# Altium PCB CTR-Charging-Base-Rev-A.PcbDoc
Units mil, origin at the board's own origin, x right, y up, seen from the top; angles counter-clockwise.
Board outline 2755.91 x 2755.91 mil, 2 copper layers (Top Layer, Bottom Layer), stack 30.2 mil thick; 31 components, 15 nets, 97 pads, 12 vias.
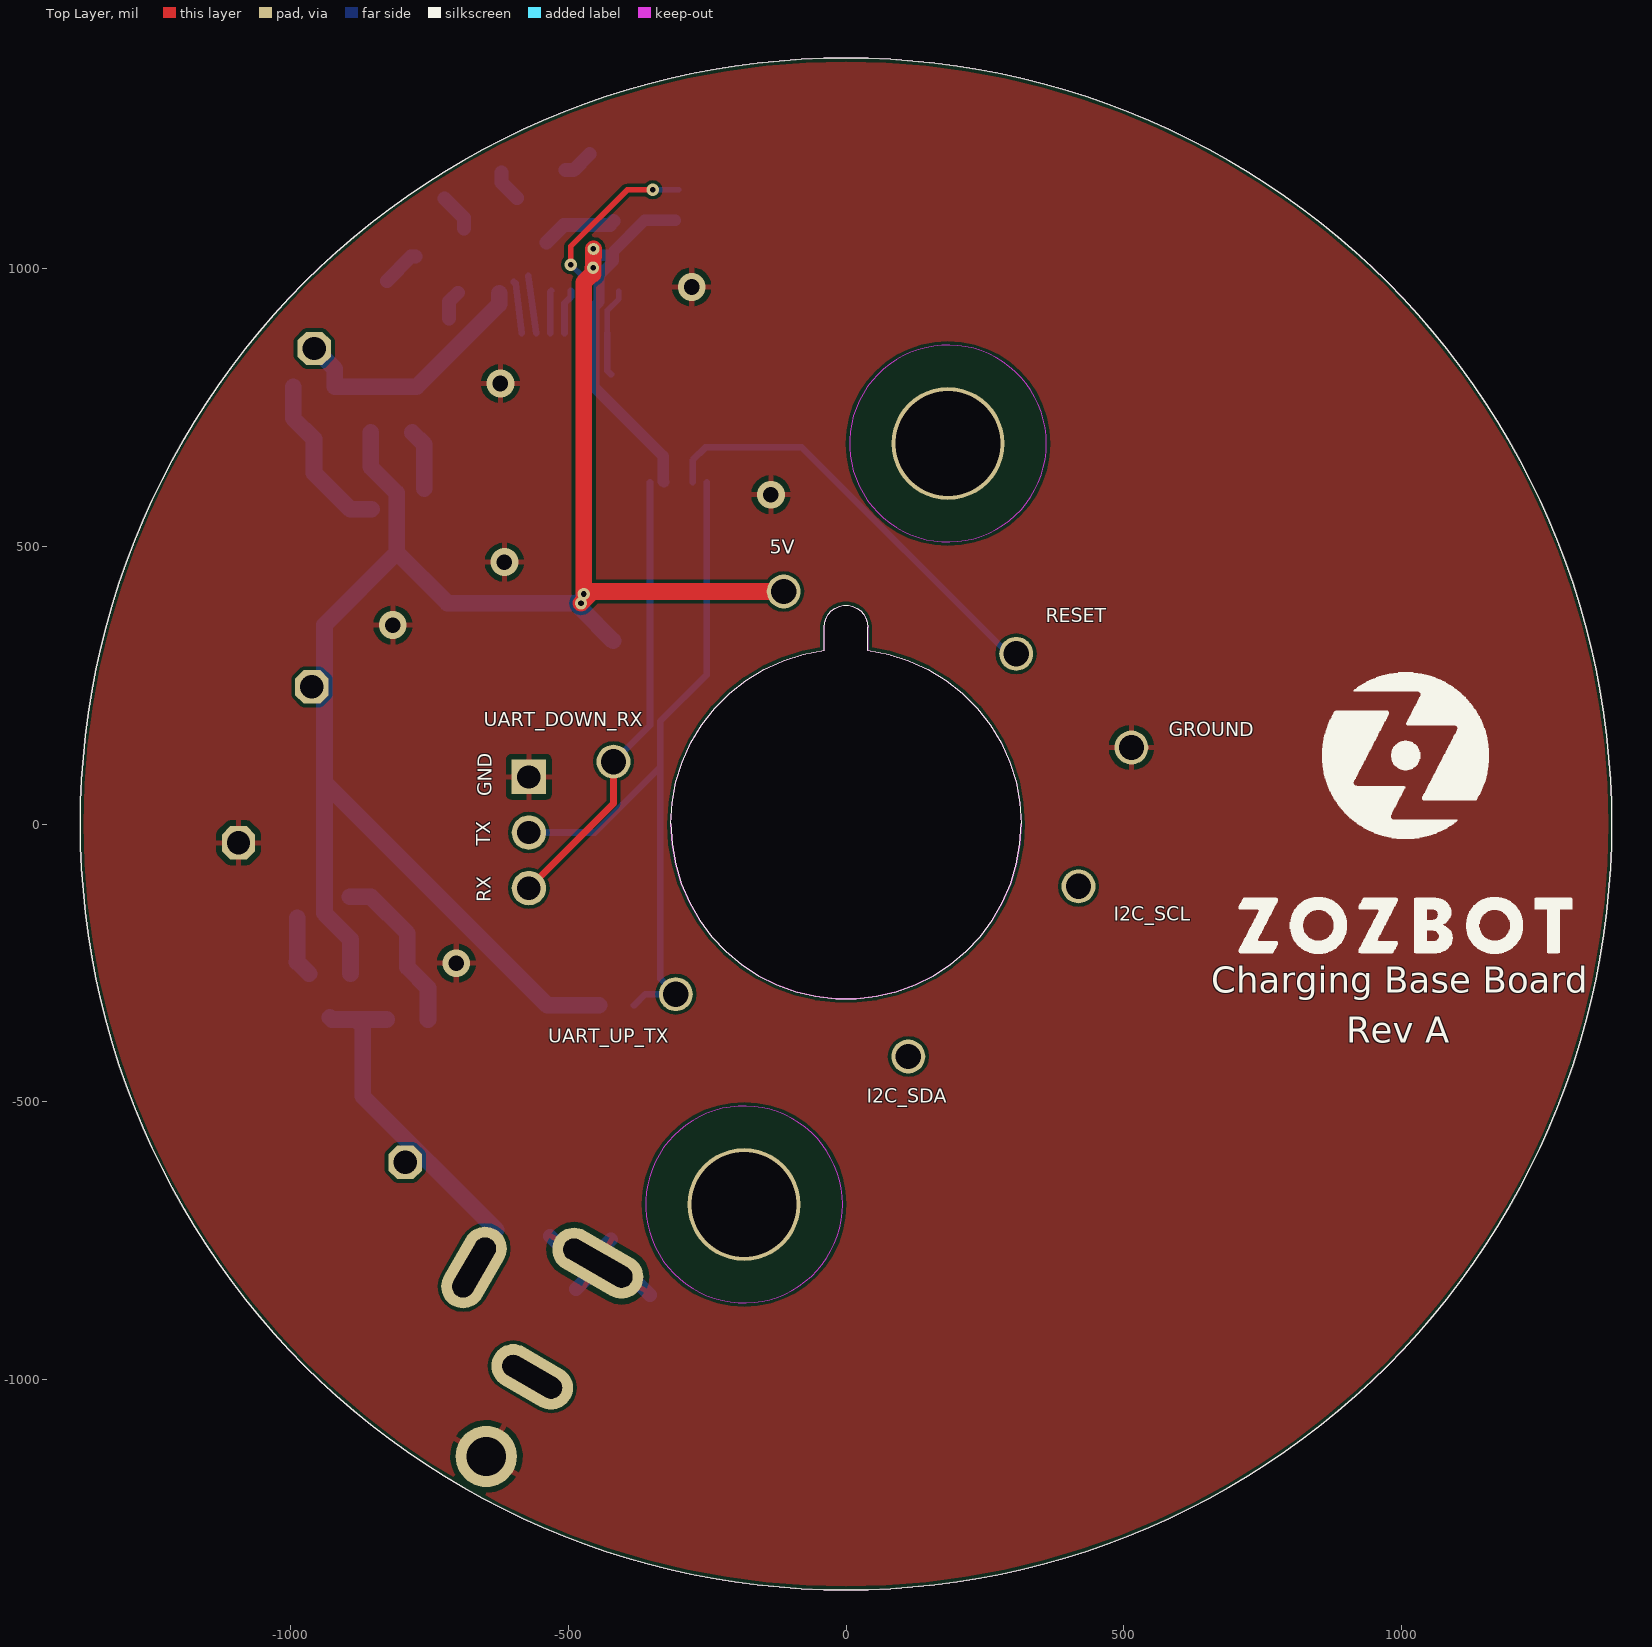
[diagram p0: Top Layer view]
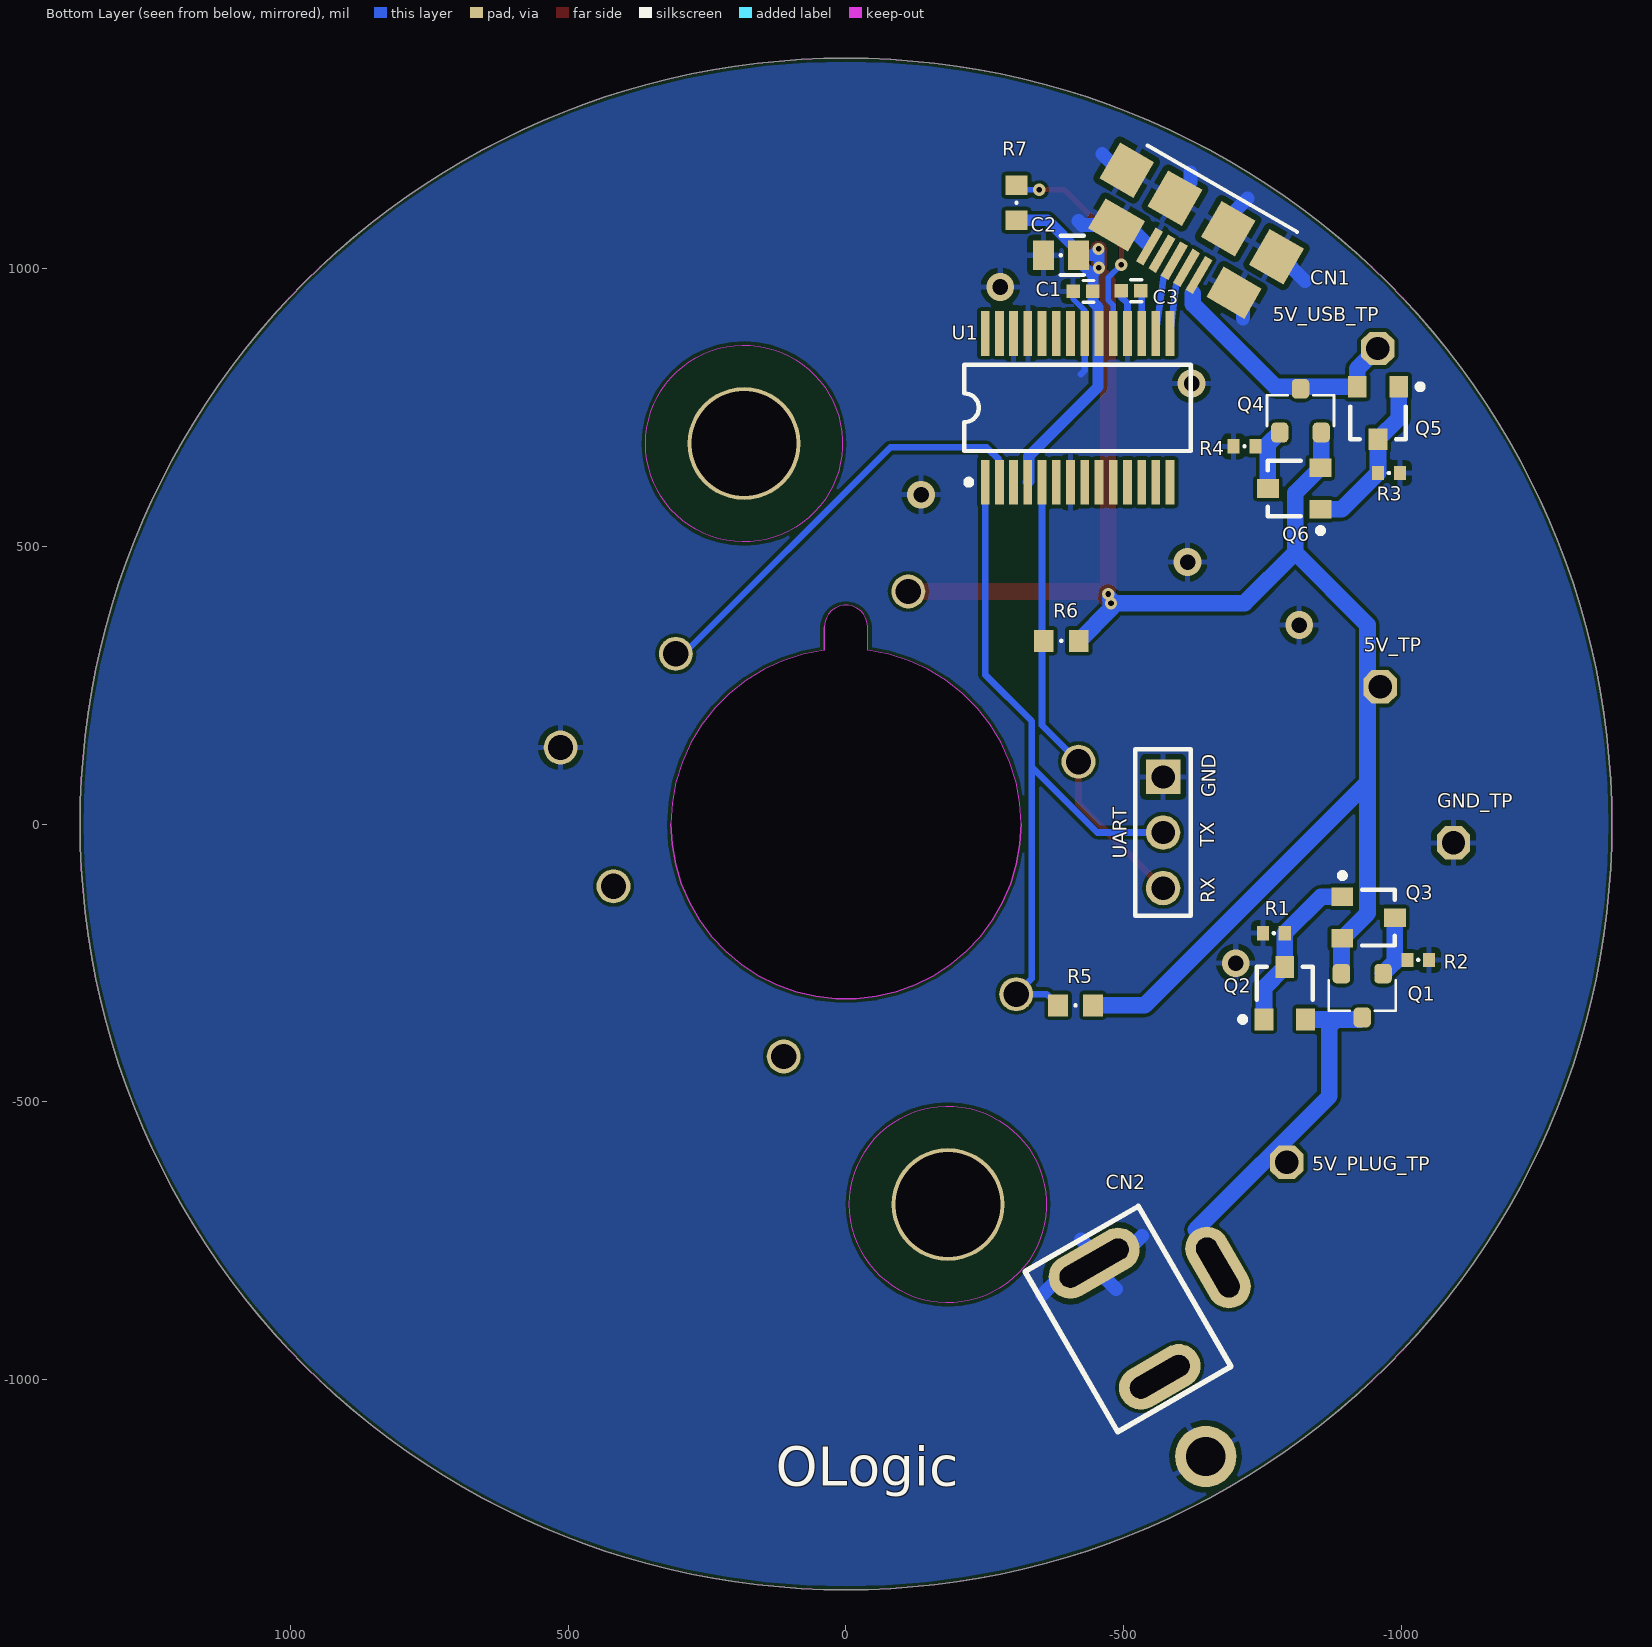
[diagram p1: Bottom Layer view, seen from below]
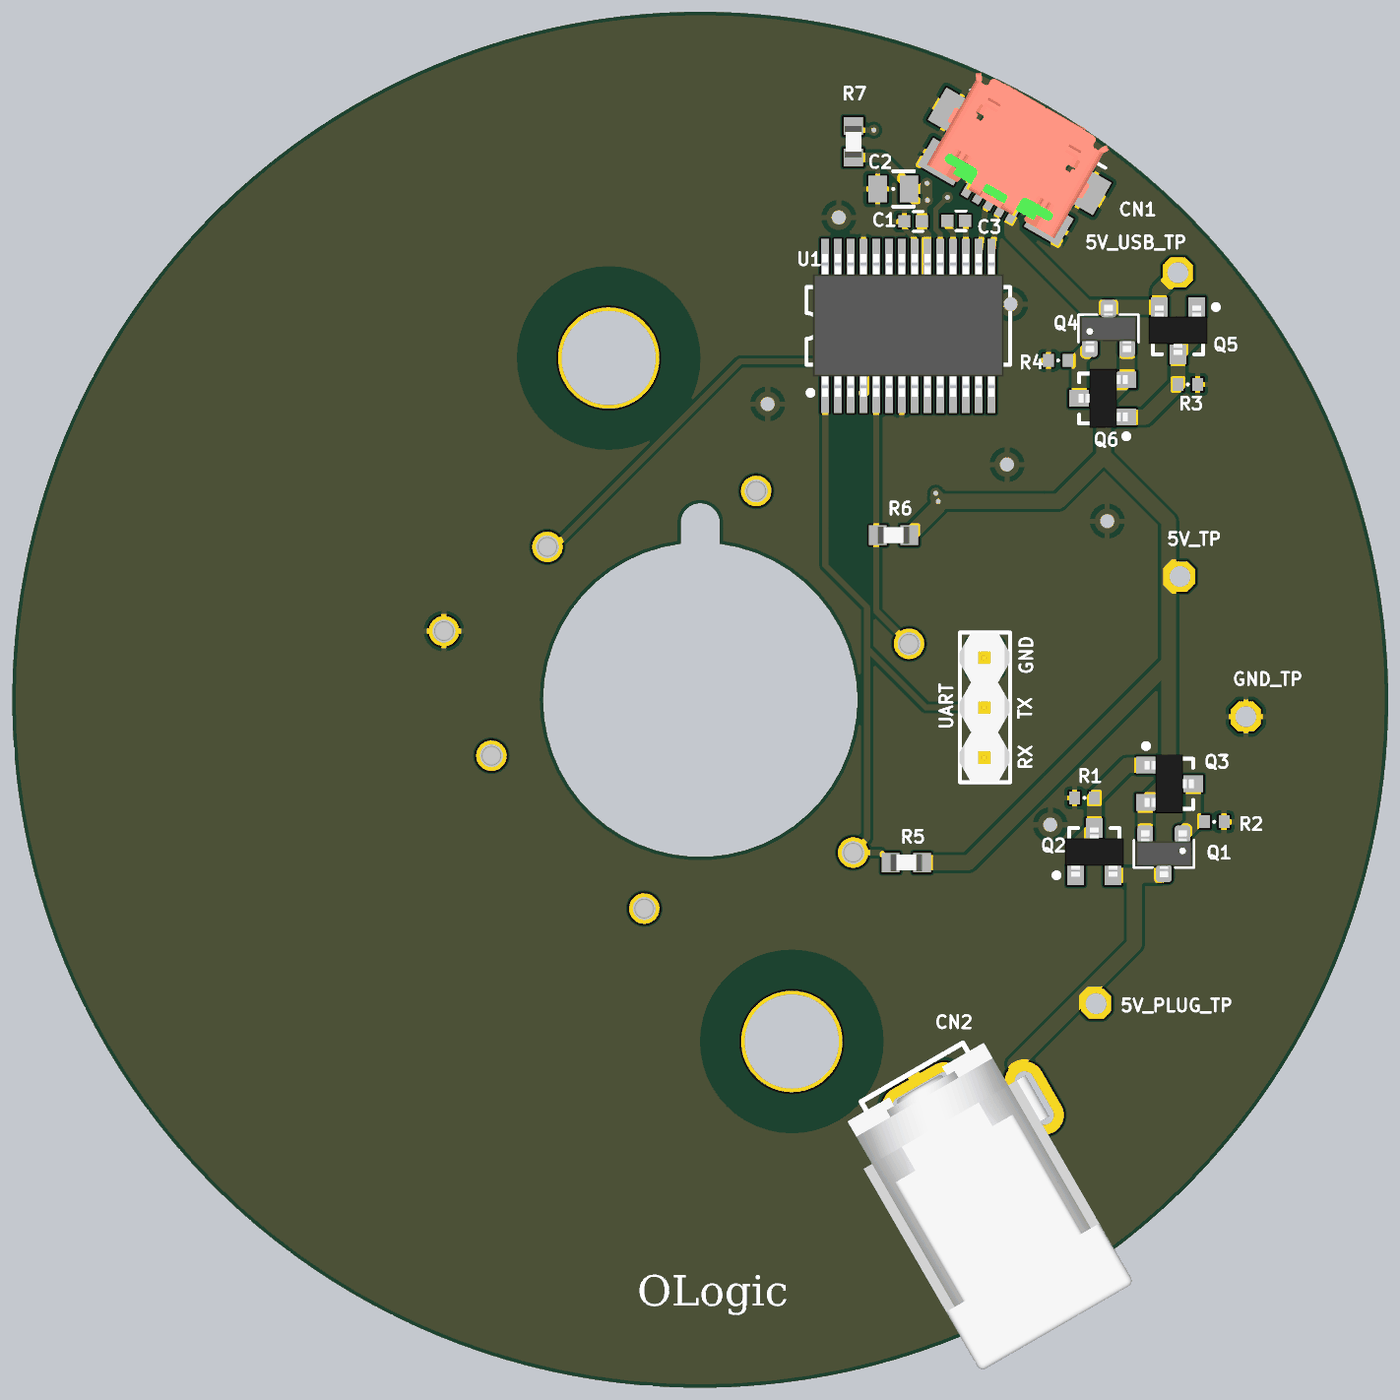
[diagram p2: 3D render of the assembled board from below, using the file's embedded part models]

## Layer stack, top to bottom
Top Solder: solder mask 0.4, Solder Resist, Dk 3.5
Top Layer: signal copper 1.4
Dielectric1: core 27.4, Dk 4.2
Bottom Layer: signal copper 1.4
Bottom Solder: solder mask 0.4, Solder Resist, Dk 3.5

## Board outline
0,-1377.95 cw(c0,0) -1377.95,0 cw(c0,0) 0,1377.95 cw(c0,0) 1377.95,0 cw(c0,0)
cut-out: 39.37,312.49 76.63,305.5 112.79,294.07 147.31,278.39 179.69,258.67 209.48,235.2 236.22,208.33 259.54,178.43 279.1,145.95 294.62,111.36 305.86,75.15 312.68,37.85 314.96,0 312.83,-36.56 306.47,-72.63 295.97,-107.72 281.46,-141.35 263.15,-173.07 241.27,-202.45 216.14,-229.09 188.08,-252.64 157.48,-272.76 124.75,-289.2 90.33,-301.73 54.69,-310.18 18.31,-314.43 -18.31,-314.43 -54.69,-310.18 -90.33,-301.73 -124.75,-289.2 -157.48,-272.76 -188.08,-252.64 -216.14,-229.09 -241.27,-202.45 -263.15,-173.07 -281.46,-141.35 -295.97,-107.72 -306.47,-72.63 -312.83,-36.56 -314.96,0 -312.68,37.85 -305.86,75.15 -294.62,111.36 -279.1,145.95 -259.54,178.43 -236.22,208.33 -209.48,235.2 -179.69,258.67 -147.31,278.39 -112.79,294.07 -76.64,305.5 -39.37,312.49 -39.37,354.33 -38.51,362.52 -35.97,370.34 -31.85,377.47 -26.34,383.59 -19.69,388.43 -12.17,391.77 -4.12,393.49 4.12,393.49 12.17,391.77 19.68,388.43 26.34,383.59 31.85,377.47 35.97,370.34 38.51,362.52 39.37,354.33

## Design rules (kind name [scope] priority, off if disabled: settings)
Clearance [All] p1: gap=6 ignorepadtopadclearanceinfootprint=FALSE except(0: Arc-Hole Track-Hole SMDPad-Hole THPad-Hole Via-Hole Fill-Hole Poly-Hole Region-Hole Text-Hole)
ComponentClearance ComponentClearance_BAT [InComponent('BT1') vs InComponent('CN3')] p1: gap=0 collisioncheckmode=3 verticalgap=0 showdistances=FALSE
ComponentClearance [All] p2: gap=7 collisioncheckmode=3 verticalgap=7 showdistances=FALSE
HoleSize [All] p1: absolutevalues=TRUE maxlimit=300 minlimit=10 maxpercent=80.000 minpercent=20.000
HoleToHoleClearance [All] p1: gap=7 allowstackedmicrovias=TRUE
MinimumSolderMaskSliver [InNet('VIN')] p1: minsoldermaskwidth=0.5
NetAntennae NetAntennae_ANT [InNetClass('ANT')] p1: netantennaetolerance=0
NetAntennae [All] p2: netantennaetolerance=0
PolygonConnect [All] p1: connectstyle=Relief reliefconductorwidth=10 reliefentries=4 polygonreliefangle="90 Angle" airgapwidth=10
RoomDefinition U_ID2 [InComponentClass('U_ID2')] p1: confinementstyle=ConfineIn formatcopy=TRUE lockcomponents=FALSE outline -1073.23,822.05 -672.83,822.05 -672.83,514.96 -1073.23,514.96
RoomDefinition U_ID1 [InComponentClass('U_ID1')] p2: confinementstyle=ConfineIn formatcopy=TRUE lockcomponents=FALSE outline -673.23,-387.01 -1073.62,-387.01 -1073.62,-79.92 -673.23,-79.92
RoutingVias [All] p1: holewidth=20 width=34 viastyle="Through Hole" minholewidth=10 minwidth=22 maxholewidth=35 maxwidth=50
SMDNeckDown [All] p1: percent=400.000
SilkToBoardRegionClearance [InNet('3.3V')] p1:
SilkToSilkClearance [All] p1: silktosilkclearance=0
SilkToSolderMaskClearance [IsPad] p1: minsilkscreentomaskgap=0 clearancetoexposedcopper=TRUE
SolderMaskExpansion [All] p1: expansion=4
ViasUnderSMD [All] p1: allowed=FALSE
Width [All] p1: maxlimit=30 minlimit=7 preferedwidth=7 minimp=50.000000 maximp=50.000000 favimp=50.000000
22 further rules are at their usual default settings.

## Classes and differential pairs
component class U_ID2: Q4 Q5 Q6 R3 R4
component class U_ID1: Q1 Q2 Q3 R1 R2
component class CTR-Charging-Base-Rev-A-Power-1: 5V 5V_PLUG_TP 5V_TP 5V_USB_TP C1 C2 C3 CN1 CN2 GND_TP GROUND I2C_SCL I2C_SDA R5 R6 R7 RESET U1 UART UART_DOWN_RX UART_UP_TX

## Components (designator, comment, footprint, x,y, rotation, side; value= is the part's Value field where it differs from the comment)
5V "Pogo Pin Target Small" CTR_POGO_PIN_TARGET_SMALL -112.09,418.31 r90 top locked
5V_PLUG_TP "Test Point" "TestPoint-TH 42 mil" -792.91,-608.66 r90 bottom
5V_TP "Test Point" "TestPoint-TH 42 mil" -961.02,246.85 r90 bottom
5V_USB_TP "Test Point" "TestPoint-TH 42 mil" -956.69,855.51 r90 bottom
C1 "0.1uF" CAPC0402(1005)_N -426.38,958.27 r0 bottom
C2 "10uF" CAPC0805(2012)_L -386.61,1023.23 r0 bottom
C3 "0.1uF" CAPC0402(1005)_N -512.6,959.45 r0 bottom
CN1 "Micro-USB RA Type B" USB-MICRO-B -639.76,1098.62 r300 bottom
CN2 "PJ-050AH 2.0mm" PJ-050AH -446.46,-790.1 r330 bottom
GND_TP "Test Point" "TestPoint-TH 42 mil" -1092.91,-33.86 r90 bottom
GROUND "Pogo Pin Target Small" CTR_POGO_PIN_TARGET_SMALL 513.39,137.56 r90 top locked
I2C_SCL "Pogo Pin Target Small" CTR_POGO_PIN_TARGET_SMALL 418.31,-112.09 r0 top locked
I2C_SDA "Pogo Pin Target Small" CTR_POGO_PIN_TARGET_SMALL 112.09,-418.31 r0 top locked
Q1 "DMG2305UX" DMG2305UX-7 -928.74,-308.66 r0 bottom
Q2 "MMBT2907A" SOT23 -789.37,-304.33 r180 bottom
Q3 "MMBT2907A" SOT23 -940.16,-168.5 r270 bottom
Q4 "DMG2305UX" DMG2305UX-7 -817.72,743.7 r180 bottom
Q5 "MMBT2907A" SOT23 -957.09,739.37 r0 bottom
Q6 "MMBT2907A" SOT23 -806.3,603.54 r90 bottom
R1 "47K" RESC0402(1005)_N -769.68,-196.46 r180 bottom
R2 "54.9K" RESC0402(1005)_N -1029.53,-244.49 r0 bottom
R3 "47K" RESC0402(1005)_N -976.77,631.5 r0 bottom
R4 "54.9K" RESC0402(1005)_N -716.93,679.53 r180 bottom
R5 "10K" RESC0603(1608)_N -412.99,-326.38 r180 bottom
R6 "10K" RESC0603(1608)_N -387.4,329.53 r0 bottom
R7 "10K" RESC0603(1608)_N -306.69,1117.72 r270 bottom
RESET "Pogo Pin Target Small" CTR_POGO_PIN_TARGET_SMALL 306.22,306.22 r90 top locked
U1 "FT232RL" SSOP-28 -416.73,748.82 r180 bottom
UART "Header 3" HDR1X3 -570.47,84.65 r270 bottom
UART_DOWN_RX "Pogo Pin Target Small" CTR_POGO_PIN_TARGET_SMALL -418.31,112.09 r90 top locked
UART_UP_TX "Pogo Pin Target Small" CTR_POGO_PIN_TARGET_SMALL -306.22,-306.22 r90 top locked

## Footprints (in the part's own frame and the unit in brackets; to place one, negate y for a bottom-side part, rotate by r counter-clockwise, add the part's x,y. Pads: shape width x height; smd on the part's side, far side on the other; paste and mask are expansions set on the pad)
CAPC0402(1005)_N [mm] "Chip Capacitor, Body 1.0x0.5mm, Height 0.7mm, IPC Medium Density"
  rect 0.62x0.62 smd: 1(-0.45,0) 2(0.45,0)
  silkscreen extent -0.5,-0.5 0,0.5, body extent -0.55,-0.3 0.55,0.3, height 0.7
CAPC0805(2012)_L [mm] "Chip Capacitor, Body 2.0x1.2mm, Height 1.55mm, IPC High Density"
  rect 0.95x1.35 smd: 1(-0.8,0) 2(0.8,0)
  silkscreen extent -1.05,-0.9 0.05,0.9, body extent -1.1,-0.72 1.1,0.72, height 1.55
CTR_POGO_PIN_TARGET_SMALL [mm] "Through-hole pogo pin target, small"
  round 1.55 hole 1.15: 1(0,0)
  body extent -1.1,-1.1 1.11,1.11, height 3.44
DMG2305UX-7 [mm] "SOT95P240X110-3L30 - Small Outline Transistor (SOT23), 0.95 mm pitch; 3 pin, 2.90 mm L X 1.30 mm W X 1.10 mm H body"
  rrect50% 0.8x0.9 smd: D(0,1) G(-0.95,-1) S(0.95,-1)
  silkscreen extent -1.53,-0.7 1.53,0.7, body extent -1.45,-1.2 1.45,1.2, height 1.1
HDR1X3 [mil]
  rect 62x62 hole 42: 1(0,0)
  round 62 hole 42: 2(100,0) 3(200,0)
  silkscreen extent -50,-50 250,50, body extent -50,-51 250,49, height 330
PJ-050AH [mm] "Power Connector, 2.0mm ID, 5.5mm OD"
  oval 4.5x2 hole 1 slot 3.5 at 0 deg: 1(0,0)
  oval 4x2 hole 1 slot 3 at 0 deg: 2(0,6)
  oval 2x4 hole 1 slot 3 at 90 deg: 3(-4.8,3)
  round 2.8 hole 1.8: 4(0,10.2)
  silkscreen extent -3.05,-1.24 2.92,7.21, body extent -4.98,-0.72 4.52,13.68, height 11
RESC0402(1005)_N [mm] "Chip Resistor, Body 1.0x0.5mm, IPC Medium Density"
  rect 0.55x0.65 smd: 1(-0.5,0) 2(0.5,0)
  silkscreen extent -0.05,-0.05 0.05,0.05, body extent -0.52,-0.27 0.53,0.28, height 0.4
RESC0603(1608)_N [mm] "Chip Resistor, Body 1.6x0.8mm, IPC Medium Density"
  rect 0.9x1 smd: 1(-0.8,0) 2(0.8,0)
  silkscreen extent -0.05,-0.05 0.05,0.05, body extent -0.8,-0.43 0.8,0.43, height 0.51
SOT23 [mm] "SOT-23; 3 Leads; Body 3.0 x 2.5 mm, inc. leads (LxW max)"
  rect 0.85x1 smd: 1(-0.95,-1.2) 2(0.95,-1.2) 3(0,1.2)
  silkscreen extent -2.05,-1.32 1.28,1.2, body extent -1.5,-1.27 1.5,1.23, height 1.1
SSOP-28 [mm] "SSOP, Plastic; 28 Leads; Body Width 5.2 mm; Pitch 0.65 mm"
  rect 0.4x2.05 smd: 1(-4.225,-3.4) 2(-3.575,-3.4) 3(-2.925,-3.4) 4(-2.275,-3.4) 5(-1.625,-3.4) 6(-0.975,-3.4) 7(-0.325,-3.4) 8(0.325,-3.4) 9(0.975,-3.4) 10(1.625,-3.4) 11(2.275,-3.4) 12(2.925,-3.4) 13(3.575,-3.4) 14(4.225,-3.4) 15(4.225,3.4) 16(3.575,3.4) 17(2.925,3.4) 18(2.275,3.4) 19(1.625,3.4) 20(0.975,3.4) 21(0.325,3.4) 22(-0.325,3.4) 23(-0.975,3.4) 24(-1.625,3.4) 25(-2.275,3.4) 26(-2.925,3.4) 27(-3.575,3.4) 28(-4.225,3.4)
  silkscreen extent -5.18,-3.52 5.17,1.98, body extent -4.85,-3.6 4.85,3.66, height 1.2
"TestPoint-TH 42 mil" [mil] "Test Point - Thru-Hole 42 mil"
  oct 60x60 hole 42: 1(0,0)
USB-MICRO-B [mm] "Micro RA USB-B Connector"
  rect 1.9x1.8 smd: 0(0,-3.95) 0(0,1.4) 0(0,-1.4) 0(0,3.95)
  rect 1.6x2 smd: 0(2.4,3.1)
  rect 1.6x2.1 smd: 0(2.4,-3.1)
  rect 1.8x0.4 smd: 1(2.5,1.3) 2(2.5,0.65) 3(2.5,0) 4(2.5,-0.65) 5(2.5,-1.3)
  silkscreen extent -1.45,-3.7 -1.45,4.2, body extent -2.66,-3.96 3,3.96, height 2.73

## Part data
5V GROUND I2C_SCL I2C_SDA RESET UART_DOWN_RX UART_UP_TX: library part "CTR Pogo Pin Target Small", "CTR Pogo Pin Target Small", Manufacturer 1=CTR, Manufacturer Part Number 1="Small Target", Category="Connectors, Interconnects", Material="Copper Alloy", Mounting Type="Through Hole", Part Status=Active, Plating=Gold, Supplier 1=CTR, Supplier Part Number 1="Small Target", Supplier Stock 1=9999999, Supplier Unit Price 1=0.131
5V_PLUG_TP 5V_TP 5V_USB_TP GND_TP: library part "TestPoint, small"
C1 C3: library part "CAP CER 0.1UF 16V 10% X5R 0402", "0.1uF 0402 16V", Capacitance=0.1µF, Manufacturer="Taiyo Yuden", Manufacturer Part Number=EMK105BJ104KV-F, Operating Temperature="-55°C ~ 85°C", Package / Case=0402, Ratings=-, Supplier Part Number 1=587-1226-2-ND, Temperature Coefficient=X5R, Tolerance=±10%, Voltage - Rated=16V, Applications="General Purpose", Category=Capacitors, ComponentLink1Description=http://www.yuden.co.jp/or/product/category/capacitor/EMK105BJ104KV-F.pdf, ComponentLink1URL=http://www.yuden.co.jp/or/product/category/capacitor/EMK105BJ104KV-F.pdf, Features=-, Height - Seated (Max)=-, Lead Spacing=-, Lead Style=-, Mounting Type="Surface Mount, MLCC", Packaging="Tape & Reel (TR)", Pricing 1="10000=0.0042, 20000=0.004, 30000=0.0038, 50000=0.0034 (USD)", RoHS="RoHS Compliant", Size / Dimension="0.039\" L x 0.020\" W (1.00mm x 0.50mm)", Stock 1=590000, Supplier 1=Digi-Key, Thickness (Max)="0.022\" (0.55mm)"
C2: library part "CAP CER 10UF 16V 10% X5R 0805", "10UF 0805 16V", Capacitance=10µF, Manufacturer="Murata Electronics North America", Manufacturer Part Number=GRM21BR61C106KE15L, Operating Temperature="-55°C ~ 85°C", Package / Case=0805, Ratings=-, Supplier Part Number 1=490-3886-1-ND, Temperature Coefficient=X5R, Tolerance=±10%, Voltage - Rated=16V, Applications="General Purpose", Category=Capacitors, ComponentLink1Description=http://www.murata.com/products/catalog/pdf/c02e.pdf, ComponentLink1URL=http://www.murata.com/products/catalog/pdf/c02e.pdf, Features=-, Height - Seated (Max)=-, Lead Spacing=-, Lead Style=-, Mounting Type="Surface Mount, MLCC", Packaging="Cut Tape (CT)", Pricing 1="1=0.25, 10=0.171, 50=0.1038, 100=0.0872, 250=0.07056, 500=0.06226, 1000=0.05291 (USD)", RoHS="RoHS Compliant", Size / Dimension="0.079\" L x 0.049\" W (2.00mm x 1.25mm)", Stock 1=1725870, Supplier 1=Digi-Key, Thickness (Max)="0.053\" (1.35mm)"
CN1: library part Micro-USB-B, Manufacturer 1=FCI, Manufacturer Part Number 1=10118192-0001LF, Supplier Part Number 1=609-4613-1-ND, Supplier 1=Digi-Key
CN2: library part PJ-050AH, "Power Barrel Connector Jack 2.00mm ID 5.50mm OD Through Hole, Right Angle", Color=Black, Current Rating=5A, Manufacturer=CUI, Operating Temperature="-25°C ~ 85°C", Supplier Part Number 1=CP-050AH-ND, Voltage - Rated=24VDC, Category="Connectors, Interconnects", ComponentLink1Description=http://www.mouser.com/ds/2/670/PJ-050AH-524150.pdf, ComponentLink1URL=http://www.mouser.com/ds/2/670/PJ-050AH-524150.pdf, Connector Type=Jack, Contact Material=Copper, Contact Material - Plating=Nickel, Family="Barrel - Power Connectors", Features=-, Gender=Male, Housing Color=Black, Housing Material=Thermoplastic, Internal Switch(s)="Single Switch, Normally Closed", Manufacturer Part Number=PJ-050AH, Mounting Type="Through Hole, Right Angle", Number of Positions/Contacts="2 Conductors, 3 Contacts", Plug/Mating Plug Diameter="2.1mm ID, 5.5mm OD", Pricing 1="1=0.78, 10=0.689, 25=0.648, 50=0.621, 100=0.594, 250=0.54, 500=0.486, 1000=0.432, 2500=0.3915 (USD)", Series=-, Shielding=Unshielded, Stock 1=4408, Supplier 1=Digikey, Termination=Solder
Q1 Q4: "MOSFET P-CH 20V 4.2A SOT23", Current - Continuous Drain (Id) @ 25°C="4.2A (Ta)", Drain to Source Voltage (Vdss)=20V, Input Capacitance (Ciss) @ Vds="808pF @ 15V", Manufacturer="Diodes Incorporated", Manufacturer Part Number=DMG2305UX-7, Operating Temperature="-55°C ~ 150°C (TJ)", Package / Case="TO-236-3, SC-59, SOT-23-3", Power - Max=1.4W, Supplier Device Package=SOT-23, Supplier Part Number 1=DMG2305UX-7DICT-ND, Category="Discrete Semiconductor Products", ComponentLink1Description=http://www.diodes.com/_files/datasheets/DMG2305UX.pdf, ComponentLink1URL=http://www.diodes.com/_files/datasheets/DMG2305UX.pdf, Creator=osman, FET Feature=Standard, FET Type="MOSFET P-Channel, Metal Oxide", Gate Charge (Qg) @ Vgs="10.2nC @ 4.5V", Mounting Type="Surface Mount", Packaging="Cut Tape (CT)", Pricing 1="1=0.38, 10=0.311, 100=0.1649, 500=0.10846, 1000=0.0739 (USD)", Rds On (Max) @ Id, Vgs="52 mOhm @ 4.2A, 4.5V", RoHS="RoHS Compliant", Stock 1=78669, Supplier 1=Digi-Key, Vgs(th) (Max) @ Id="900mV @ 250µA"
Q2 Q3 Q5 Q6: "PNP General Purpose Amplifier", Current - Collector (Ic) (Max)=800mA, Current - Collector Cutoff (Max)=-, DC Current Gain (hFE) (Min) @ Ic, Vce="100 @ 150mA, 10V", Frequency - Transition=200MHz, Manufacturer="Fairchild Semiconductor", Package / Case="TO-236-3, SC-59, SOT-23-3", Power - Max=350mW, Supplier Device Package=SOT-23, Supplier Part Number 1=MMBT2907AFSCT-ND, Voltage - Collector Emitter Breakdown (Max)=60V, Category="Discrete Semiconductor Products", ComponentLink1Description=http://www.fairchildsemi.com/ds/MM/MMBT2907A.pdf, ComponentLink1URL=http://www.fairchildsemi.com/ds/MM/MMBT2907A.pdf, Manufacturer Part Number=MMBT2907A, Mounting Type="Surface Mount", MPN=MMBT2907A, Packaging="Cut Tape (CT)", PN=MMBT2907AFSCT-ND, Pricing 1="1=0.2, 10=0.187, 25=0.17, 100=0.1224, 250=0.07208, 500=0.0598, 1000=0.04079 (USD)", RoHS="RoHS Compliant", Stock 1=74892, Supplier 1=Digi-Key, Transistor Type=PNP, Vce Saturation (Max) @ Ib, Ic="1.6V @ 50mA, 500mA", Vendor=Digikey
R1 R3: library part "RES 47K OHM 5% 1/10W 0402", "47K 0402", Manufacturer="Panasonic Electronic Components", Manufacturer Part Number=ERJ-2GEJ473X, Operating Temperature="-55°C ~ 155°C", Package / Case="0402 (1005 Metric)", Power (Watts)="0.1W, 1/10W", Resistance (Ohms)=47k, Supplier Device Package=0402, Supplier Part Number 1=P47KJCT-ND, Temperature Coefficient=±200ppm/°C, Tolerance=±5%, Category=Resistors, ComponentLink1Description=http://industrial.panasonic.com/www-cgi/jvcr13pz.cgi?E+PZ+3+AOA0001+ERJ2GEJ473X+7+WW, ComponentLink1URL=http://industrial.panasonic.com/www-cgi/jvcr13pz.cgi?E+PZ+3+AOA0001+ERJ2GEJ473X+7+WW, Composition="Thick Film", Features="Automotive AEC-Q200", Height="0.016\" (0.40mm)", Number of Terminations=2, Packaging="Cut Tape (CT)", Pricing 1="1=0.1, 50=0.0106, 100=0.0078, 250=0.00596, 500=0.00476, 1000=0.0035, 5000=0.00251 (USD)", RoHS="RoHS Compliant", Size / Dimension="0.039\" L x 0.020\" W (1.00mm x 0.50mm)", Stock 1=1670564, Supplier 1=Digi-Key
R2 R4: library part "RES 54.9K OHM 1% 1/10W 0402", "54.9K 1% 0402", Manufacturer="Panasonic Electronic Components", Manufacturer Part Number=ERJ-2RKF5492X, Operating Temperature="-55°C ~ 155°C", Package / Case="0402 (1005 Metric)", Power (Watts)="0.1W, 1/10W", Resistance (Ohms)=54.9k, Supplier Device Package=0402, Supplier Part Number 1=P54.9KLCT-ND, Temperature Coefficient=±100ppm/°C, Tolerance=±1%, Category=Resistors, ComponentLink1Description=http://industrial.panasonic.com/www-cgi/jvcr13pz.cgi?E+PZ+3+AOA0002+ERJ2RKF5492X+7+WW, ComponentLink1URL=http://industrial.panasonic.com/www-cgi/jvcr13pz.cgi?E+PZ+3+AOA0002+ERJ2RKF5492X+7+WW, Composition="Thick Film", Failure Rate=-, Features="Automotive AEC-Q200", Height - Seated (Max)="0.016\" (0.40mm)", Number of Terminations=2, Packaging="Cut Tape (CT)", Part Status=Active, Pricing 1="1=0.1, 50=0.015, 100=0.011, 250=0.0084, 500=0.00674, 1000=0.00496, 5000=0.00355 (USD)", RoHS="RoHS Compliant", Size / Dimension="0.039\" L x 0.020\" W (1.00mm x 0.50mm)", Stock 1=151111, Supplier 1=Digi-Key
R5 R6 R7: library part "RES 10K OHM 1/10W 5% 0603 SMD", "10K 0603", Manufacturer="Panasonic Electronic Components", Manufacturer Part Number=ERJ-3GEYJ103V, Package / Case="0603 (1608 Metric)", Power (Watts)="0.1W, 1/10W", Resistance (Ohms)=10k, Supplier Device Package=0603, Supplier Part Number 1=P10KGCT-ND, Temperature Coefficient=±200ppm/°C, Tolerance=±5%, Category=Resistors, ComponentLink1Description=http://industrial.panasonic.com/www-cgi/jvcr13pz.cgi?E+PZ+3+AOA0001+ERJ3GEYJ103V+7+WW, ComponentLink1URL=http://industrial.panasonic.com/www-cgi/jvcr13pz.cgi?E+PZ+3+AOA0001+ERJ3GEYJ103V+7+WW, Composition="Thick Film", Features=-, Height="0.022\" (0.55mm)", Number of Terminations=2, Packaging="Cut Tape (CT)", Pricing 1="1=0.1, 50=0.0126, 100=0.0096, 250=0.00716, 500=0.00528, 1000=0.00352, 2500=0.00297 (USD)", RoHS="RoHS Compliant", Size / Dimension="0.063\" L x 0.031\" W (1.60mm x 0.80mm)", Stock 1=4724855, Supplier 1=Digi-Key
U1: "USB Bridge, USB to UART USB 2.0 UART Interface 28-SSOP", Manufacturer="Future Technology Devices International (FTDI)", Manufacturer Part Number=FT232RL-REEL, Operating Supply Voltage (Max)=5.25V, Operating Supply Voltage (Min)=3.3V, Operating Supply Voltage (Typ)=5V, Operating Temperature (Max)=85C, Operating Temperature (Min)=-40C, Operating Temperature Classification=Industrial, Package Type=SSOP, Supplier Part Number 1=768-1007-1-ND, Supply Current=15(Typ)mA, ComponentLink1Description=https://datasheet.ciiva.com/34304/2161019-34304054.pdf, ComponentLink1URL=https://datasheet.ciiva.com/34304/2161019-34304054.pdf, ComponentLink2Description=https://datasheet.ciiva.com/1787/ds-ft232r-1787047.pdf, ComponentLink2URL=https://datasheet.ciiva.com/1787/ds-ft232r-1787047.pdf, ComponentLink3Description=https://datasheet.ciiva.com/1787/ds-ft232r-1787048.pdf, ComponentLink3URL=https://datasheet.ciiva.com/1787/ds-ft232r-1787048.pdf, ComponentLink4Description=https://datasheet.ciiva.com/1787/ds-ft232r-1787049.pdf, ComponentLink4URL=https://datasheet.ciiva.com/1787/ds-ft232r-1787049.pdf, ComponentLink5Description=https://datasheet.ciiva.com/4787/ds-ft232r-11534-4787658.pdf, ComponentLink5URL=https://datasheet.ciiva.com/4787/ds-ft232r-11534-4787658.pdf, ComponentLink6Description=https://datasheet.ciiva.com/15150/getdatasheetpartid-643207-15150506.pdf, ComponentLink6URL=https://datasheet.ciiva.com/15150/getdatasheetpartid-643207-15150506.pdf, ComponentLink7Description=https://datasheet.ciiva.com/16200/ds-ft232r-16200652.pdf, ComponentLink7URL=https://datasheet.ciiva.com/16200/ds-ft232r-16200652.pdf, ComponentLink8Description=https://datasheet.ciiva.com/26841/ft232rl-reel-26841080.pdf, ComponentLink8URL=https://datasheet.ciiva.com/26841/ft232rl-reel-26841080.pdf, Interface Circuit Standard 1=RS-232/RS-422/RS-485, Mounting="Surface Mount", Number of Channels=1, Packaging="Tape and Reel", Pin Count=28, Pricing 1="1=4.5, 10=4.05, 100=3.65, 250=3.25, 500=2.85 (USD)", Receive  FIFO=128Byte, Stock 1=420192, Supplier 1=Digikey, Transmit FIFO=256Byte, Transmitter and Receiver FIFO Counter=No
UART: "Header, 3-Pin", Color=Black, Manufacturer="Sullins Connector Solutions", Manufacturer Part Number=PRPC003SAAN-RC, Supplier Part Number 1=S1011EC-03-ND, Category="Connectors, Interconnects", ComponentLink1Description=http://media.digikey.com/PDF/Data%20Sheets/Sullins%20PDFs/xRxCzzzSxxN-RC_ST_11635-B.pdf, ComponentLink1URL=http://media.digikey.com/PDF/Data%20Sheets/Sullins%20PDFs/xRxCzzzSxxN-RC_ST_11635-B.pdf, Connector Type="Header, Unshrouded, Breakaway", Contact Finish=Gold, Contact Finish Thickness=Flash, Contact Mating Length="0.230\" (5.84mm)", Contact Type="Male Pin", Fastening Type=-, Features=-, Mounting Type="Through Hole", Number of Positions=3, Number of Positions Loaded=All, Number of Rows=1, Packaging=Bulk, Pitch="0.100\" (2.54mm)", Pricing 1="1=0.18, 10=0.16, 100=0.132, 500=0.10438, 1000=0.0896, 5000=0.08174, 10000=0.0786 (USD)", RoHS="RoHS Compliant", Row Spacing=-, Stock 1=0, Supplier 1=Digi-Key, Termination=Solder

## Free pads (board coordinates)
  round 202.98 hole 188.98: 1(-183.42,-684.51) 1(183.41,684.51)

## Via types
v1: diameter 22, hole 10, Top Layer to Bottom Layer, tented both sides, 6 vias
v2: diameter 50, hole 28, Top Layer to Bottom Layer, tented both sides, 6 vias

## Nets (pads, with @x,y where several pads share a name; then routed paths per layer and width w, separated by ;. In a path a pad name is that pad's centre, name@x,y a point inside that pad or via, vN(x,y) a via of type N, cw(c..) or ccw(c..) an arc to the next point about the centre after c; other vN are vias at no path point)
3.3V: C3.1 U1.17 | length 77.4
  Bottom Layer w12: U1.17 -531.89,957.87 C3.1
5V: 5V.1 5V_TP.1 C1.1 C2.1 Q1.S Q3.2 Q4.S Q6.2 R5.2 R6.1 R7.2 U1.4 U1.20 | length 3948.8
  Top Layer w30: v1(-476.77,397.24) -455.71,418.31 5V.1 ; v1(-471.65,413.78) -471.65,974.8 -455.12,991.34 v1(-455.12,1000.79) ; -455.12,988.98 -454.91,1000.78 v1(-454.33,1034.65)
  Bottom Layer w20: v1(-454.33,1034.65) v1@-451.77,1032.09 ; U1.20@-453.4,880.96 -453.4,786.46 -328.88,661.94 -328.88,616.68 U1.4 ; U1.20@-453.4,884.39 -453.4,929.66 -450.53,932.53 -450.53,932.71 -444.09,939.15 C1.1 -444.09,987.01 ; R7.2 -362.2,1086.22 -418.11,1030.32 C2.1 ; v1@-451.77,1032.09 -455.12,1028.74 v1(-455.12,1000.79) -444.09,989.76 -444.09,987.01 ; v1@-451.77,1032.09 -442.91,1023.23 C2.1 ; -444.09,987.01 -418.11,1012.99 C2.1
  Bottom Layer w30: -938.19,113.39 -938.19,74.41 ; Q1.S -891.34,-207.48 Q3.2 -938.19,-160.63 -938.19,74.41 ; Q4.S -855.12,642.52 Q6.2 -808.27,595.67 -808.27,488.19 ; v1(-476.77,397.24) -476.77,387.4 R6.1 ; v1@-475.2,404.72 -482.68,397.24 -717.32,397.24 -808.27,488.19 ; R5.2 -537.4,-326.38 -938.19,74.41 ; -938.19,74.41 -938.19,358.27 -808.27,488.19
5V_PLUG: 5V_PLUG_TP.1 CN2.3 Q1.D Q2.2 | length 586
  Bottom Layer w30: Q1.D -925.2,-351.57 -881.89,-351.57 ; Q2.2 -881.89,-351.57 ; CN2.3@-629.8,-729.71 -869.68,-489.82 -869.68,-363.78 -881.89,-351.57
5V_USB: 5V_USB_TP.1 CN1.1 Q4.D Q5.2 | length 461.1
  Bottom Layer w30: 5V_USB_TP.1 -919.68,818.5 Q5.2 -772.44,786.61 -624.02,935.04 CN1.1@-624.02,954.72
DM: CN1.3 U1.16 | length 104.1
  Bottom Layer w12: CN1.3@-571.69,985.82 U1.16
DP: CN1.2 U1.15 | length 95.1
  Bottom Layer w12: CN1.2@-598.03,975.2 -594.27,972.27 U1.15
GND: C1.2 C2.2 C3.2 CN1.0 CN1.5 CN2.1 CN2.4 GND_TP.1 GROUND.1 R1.1 R2.1 R3.1 R4.1 U1.7 U1.18 U1.21 U1.25 U1.26 UART.1 | length 973.4
  Bottom Layer w10: U1.21 -429.53,924.02 -408.66,944.88 C1.2
  Bottom Layer w12: U1.18 -506.3,937.01 -494.88,948.43 C3.2 ; U1.21 -429.53,815.75 -422.83,809.06
  Bottom Layer w25: -825.98,977.17 -782.28,1020.87 CN1.0@-774.44,1020.87 ; -722.05,1125.2 -687.5,1090.65 CN1.0@-687.5,1071.07 ; -714.17,909.32 -714.17,939.81 CN1.0@-698.22,955.77 ; -619.68,1172.44 -619.68,1153.84 CN1.0@-592.03,1126.18 ; -538.76,1046.44 -507.38,1077.82 -486.82,1077.82 -424.94,1077.82 -418.11,1084.65 ; -532.67,-741.24 -479.17,-794.75 CN2.1@-450,-794.75 ; CN1.0@-505.09,1176.38 -489.76,1176.38 -461.02,1205.12 ; -485.43,-836.61 CN2.1@-450,-801.18 ; CN2.1@-450,-774.8 -422.83,-747.64 ; CN2.1@-438.81,-794.75 CN2.1@-416.44,-794.75 ; CN2.1@-405.25,-794.75 -352.76,-847.24
  other v2: -701.18,-250.39 -815.35,357.87 -614.57,471.26 -135.04,592.52 -621.65,792.52 -277.56,966.14
NetQ1_G: Q1.G Q3.3 R2.2 | length 110.4
  Bottom Layer w30: Q3.3 -987.4,-248.03 -987.8,-248.43 -987.01,-248.43 Q1.G
NetQ2_1: Q2.1 Q2.3 Q3.1 R1.2 | length 301.2
  Bottom Layer w30: Q3.1 -854.72,-131.1 R1.2 Q2.3 -789.37,-257.48 -751.97,-294.88 Q2.1
NetQ4_G: Q4.G Q6.3 R4.2 | length 110.4
  Bottom Layer w30: Q4.G -759.45,683.46 -758.66,683.46 -759.06,683.07 Q6.3
NetQ5_1: Q5.1 Q5.3 Q6.1 R3.2 | length 301.2
  Bottom Layer w30: Q5.1 -994.49,729.92 -957.09,692.52 Q5.3 R3.2 -891.73,566.14 Q6.1
NetR7_1: R7.1 U1.19 | length 406.3
  Top Layer w10: v1(-495.28,1006.3) -495.28,1039.25 -393.58,1140.94 v1(-347.64,1140.94)
  Bottom Layer w10: v1(-495.28,1006.3) -471.68,982.7 -471.68,942.69 -480.71,933.66 U1.19 ; v1(-347.64,1140.94) R7.1@-301.18,1140.94
RESET: RESET.1 U1.2 | length 785.1
  Bottom Layer w12: U1.2 -275.98,654.57 -252.99,677.56 -79.53,677.56 291.81,306.22 RESET.1
UART_RX: R6.2 U1.5 UART.3 UART_DOWN_RX.1 | length 820.5
  Top Layer w12: UART.3 -418.31,36.81 UART_DOWN_RX.1
  Bottom Layer w12: UART_DOWN_RX.1 -352.76,177.64 U1.5
UART_TX: R5.1 U1.1 UART.2 UART_UP_TX.1 | length 1336.1
  Bottom Layer w12: UART.2 -451.97,-15.35 -334.25,102.36 ; R5.1 -361.34,-306.22 UART_UP_TX.1 -334.25,-278.19 -334.25,102.36 ; U1.1 -250.39,268.9 -334.25,185.04 -334.25,102.36
pads on no net: CN1.4 CN2.2 I2C_SCL.1 I2C_SDA.1 U1.3 U1.6 U1.8 U1.9 U1.10 U1.11 U1.12 U1.13 U1.14 U1.22 U1.23 U1.24 U1.27 U1.28

## Polygon pours and split planes (outlines as drawn)
GND on Top Layer "Top Layer-GND" (solid, remove dead copper, pour order 2): 9.06,1413.39 515.27,1413.39 cw(c515.27,1313.39) 585.98,1384.1 1397.48,572.6 cw(c1326.77,501.89) 1426.77,501.89 1426.77,-547.95 cw(c1326.77,-547.95) 1397.48,-618.66 625.75,-1390.4 cw(c555.04,-1319.68) 555.04,-1419.68 -539.68,-1419.68 cw(c-539.68,-1319.68) -610.39,-1390.4 -1379.37,-621.42 cw(c-1308.66,-550.7) -1408.66,-550.7 -1408.66,544.41 cw(c-1308.66,544.41) -1379.37,615.12 -605.27,1389.21 cw(c-534.56,1318.5) -534.56,1418.5 -33.07,1418.5
GND on Bottom Layer "Bottom Layer-GND" (solid, remove dead copper, pour order 0): 9.06,1413.39 515.27,1413.39 cw(c515.27,1313.39) 585.98,1384.1 1397.48,572.6 cw(c1326.77,501.89) 1426.77,501.89 1426.77,-547.95 cw(c1326.77,-547.95) 1397.48,-618.66 625.75,-1390.4 cw(c555.04,-1319.68) 555.04,-1419.68 -539.68,-1419.68 cw(c-539.68,-1319.68) -610.39,-1390.4 -1379.37,-621.42 cw(c-1308.66,-550.7) -1408.66,-550.7 -1408.66,544.41 cw(c-1308.66,544.41) -1379.37,615.12 -605.27,1389.21 cw(c-534.56,1318.5) -534.56,1418.5 -33.07,1418.5

## Keep-outs
Keep-Out Layer:
  circle w1: c183.41,684.51 r177.17
  circle w1: c-183.42,-684.51 r177.17
  lines w1: -1377.95,0 cw(c0,0) 0,1377.95 cw(c0,0) 1377.95,0 cw(c0,0) 0,-1377.95 cw(c0,0) -1377.95,0 ; -314.96,0 -312.68,37.85 -305.86,75.15 -294.62,111.36 -279.1,145.95 -259.54,178.43 -236.22,208.33 -209.48,235.2 -179.69,258.67 -147.31,278.39 -112.79,294.07 -76.64,305.5 -39.37,312.49 -39.37,354.33 -38.51,362.52 -35.97,370.34 -31.85,377.47 -26.34,383.59 -19.69,388.43 -12.17,391.77 -4.12,393.49 4.12,393.49 12.17,391.77 19.68,388.43 26.34,383.59 31.85,377.47 35.97,370.34 38.51,362.52 39.37,354.33 39.37,312.49 76.63,305.5 112.79,294.07 147.31,278.39 179.69,258.67 209.48,235.2 236.22,208.33 259.54,178.43 279.1,145.95 294.62,111.36 305.86,75.15 312.68,37.85 314.96,0 312.83,-36.56 306.47,-72.63 295.97,-107.72 281.46,-141.35 263.15,-173.07 241.27,-202.45 216.14,-229.09 188.08,-252.64 157.48,-272.76 124.75,-289.2 90.33,-301.73 54.69,-310.18 18.31,-314.43 -18.31,-314.43 -54.69,-310.18 -90.33,-301.73 -124.75,-289.2 -157.48,-272.76 -188.08,-252.64 -216.14,-229.09 -241.27,-202.45 -263.15,-173.07 -281.46,-141.35 -295.97,-107.72 -306.47,-72.63 -312.83,-36.56 -314.96,0

## Silkscreen, mask and mechanical layers (free items; w line width, h text height)
Top Overlay:
  drawing of 1341 lines, arcs and shapes, not listed
  text "GND" at -637.4,50.17 h25 r90
  text "TX" at -639.76,-39.37 h25 r90
  text "RX" at -638.98,-140.94 h25 r90
  text "Charging Base Board" at 657.09,-319.29 h80
  text "Rev A" at 900.21,-409.06 h80
Bottom Overlay:
  text "GND" at -664.96,48.2 h25 r270
  text "TX" at -662.6,-41.34 h25 r270
  text "RX" at -663.39,-142.91 h25 r270
  text "OLogic" at 126.38,-1213.78 h120
Mechanical 1:
  lines w1: -1377.95,0 cw(c0,0) 0,1377.95 cw(c0,0) 1377.95,0 cw(c0,0) 0,-1377.95 cw(c0,0) -1377.95,0 ; -314.96,0 -312.68,37.85 -305.86,75.15 -294.62,111.36 -279.1,145.95 -259.54,178.43 -236.22,208.33 -209.48,235.2 -179.69,258.67 -147.31,278.39 -112.79,294.07 -76.64,305.5 -39.37,312.49 -39.37,354.33 -38.51,362.52 -35.97,370.34 -31.85,377.47 -26.34,383.59 -19.69,388.43 -12.17,391.77 -4.12,393.49 4.12,393.49 12.17,391.77 19.68,388.43 26.34,383.59 31.85,377.47 35.97,370.34 38.51,362.52 39.37,354.33 39.37,312.49 76.63,305.5 112.79,294.07 147.31,278.39 179.69,258.67 209.48,235.2 236.22,208.33 259.54,178.43 279.1,145.95 294.62,111.36 305.86,75.15 312.68,37.85 314.96,0 312.83,-36.56 306.47,-72.63 295.97,-107.72 281.46,-141.35 263.15,-173.07 241.27,-202.45 216.14,-229.09 188.08,-252.64 157.48,-272.76 124.75,-289.2 90.33,-301.73 54.69,-310.18 18.31,-314.43 -18.31,-314.43 -54.69,-310.18 -90.33,-301.73 -124.75,-289.2 -157.48,-272.76 -188.08,-252.64 -216.14,-229.09 -241.27,-202.45 -263.15,-173.07 -281.46,-141.35 -295.97,-107.72 -306.47,-72.63 -312.83,-36.56 -314.96,0
Mechanical 3:
  drawing of 237 lines, arcs and shapes, not listed
Mechanical 15:
  lines w8: -1200.17,-677.01 -1186.39,-700.88 ; -358.77,-709.76 -579.52,-574.63 -866.39,-1071.5 -819.49,-1107.78 -549.62,-1263.59 -494.75,-1286.07 -243.64,-851.13 ; -13.78,1377.88 13.78,1377.88 ; -916.48,1016.53 -422.1,1301.96 -146.51,824.63 -640.89,539.19 -916.48,1016.53